# Altium PCB RUMBA_V2-bla.PcbDoc (part 1 of 2)
Units mm, origin at the board's own origin, x right, y up, seen from the top; angles counter-clockwise.
Board outline 145 x 75 mm, 2 copper layers (Top Layer, Bottom Layer); 189 components, 179 nets, 824 pads, 160 vias.
Unrouted connection lines stored in the file: 201.
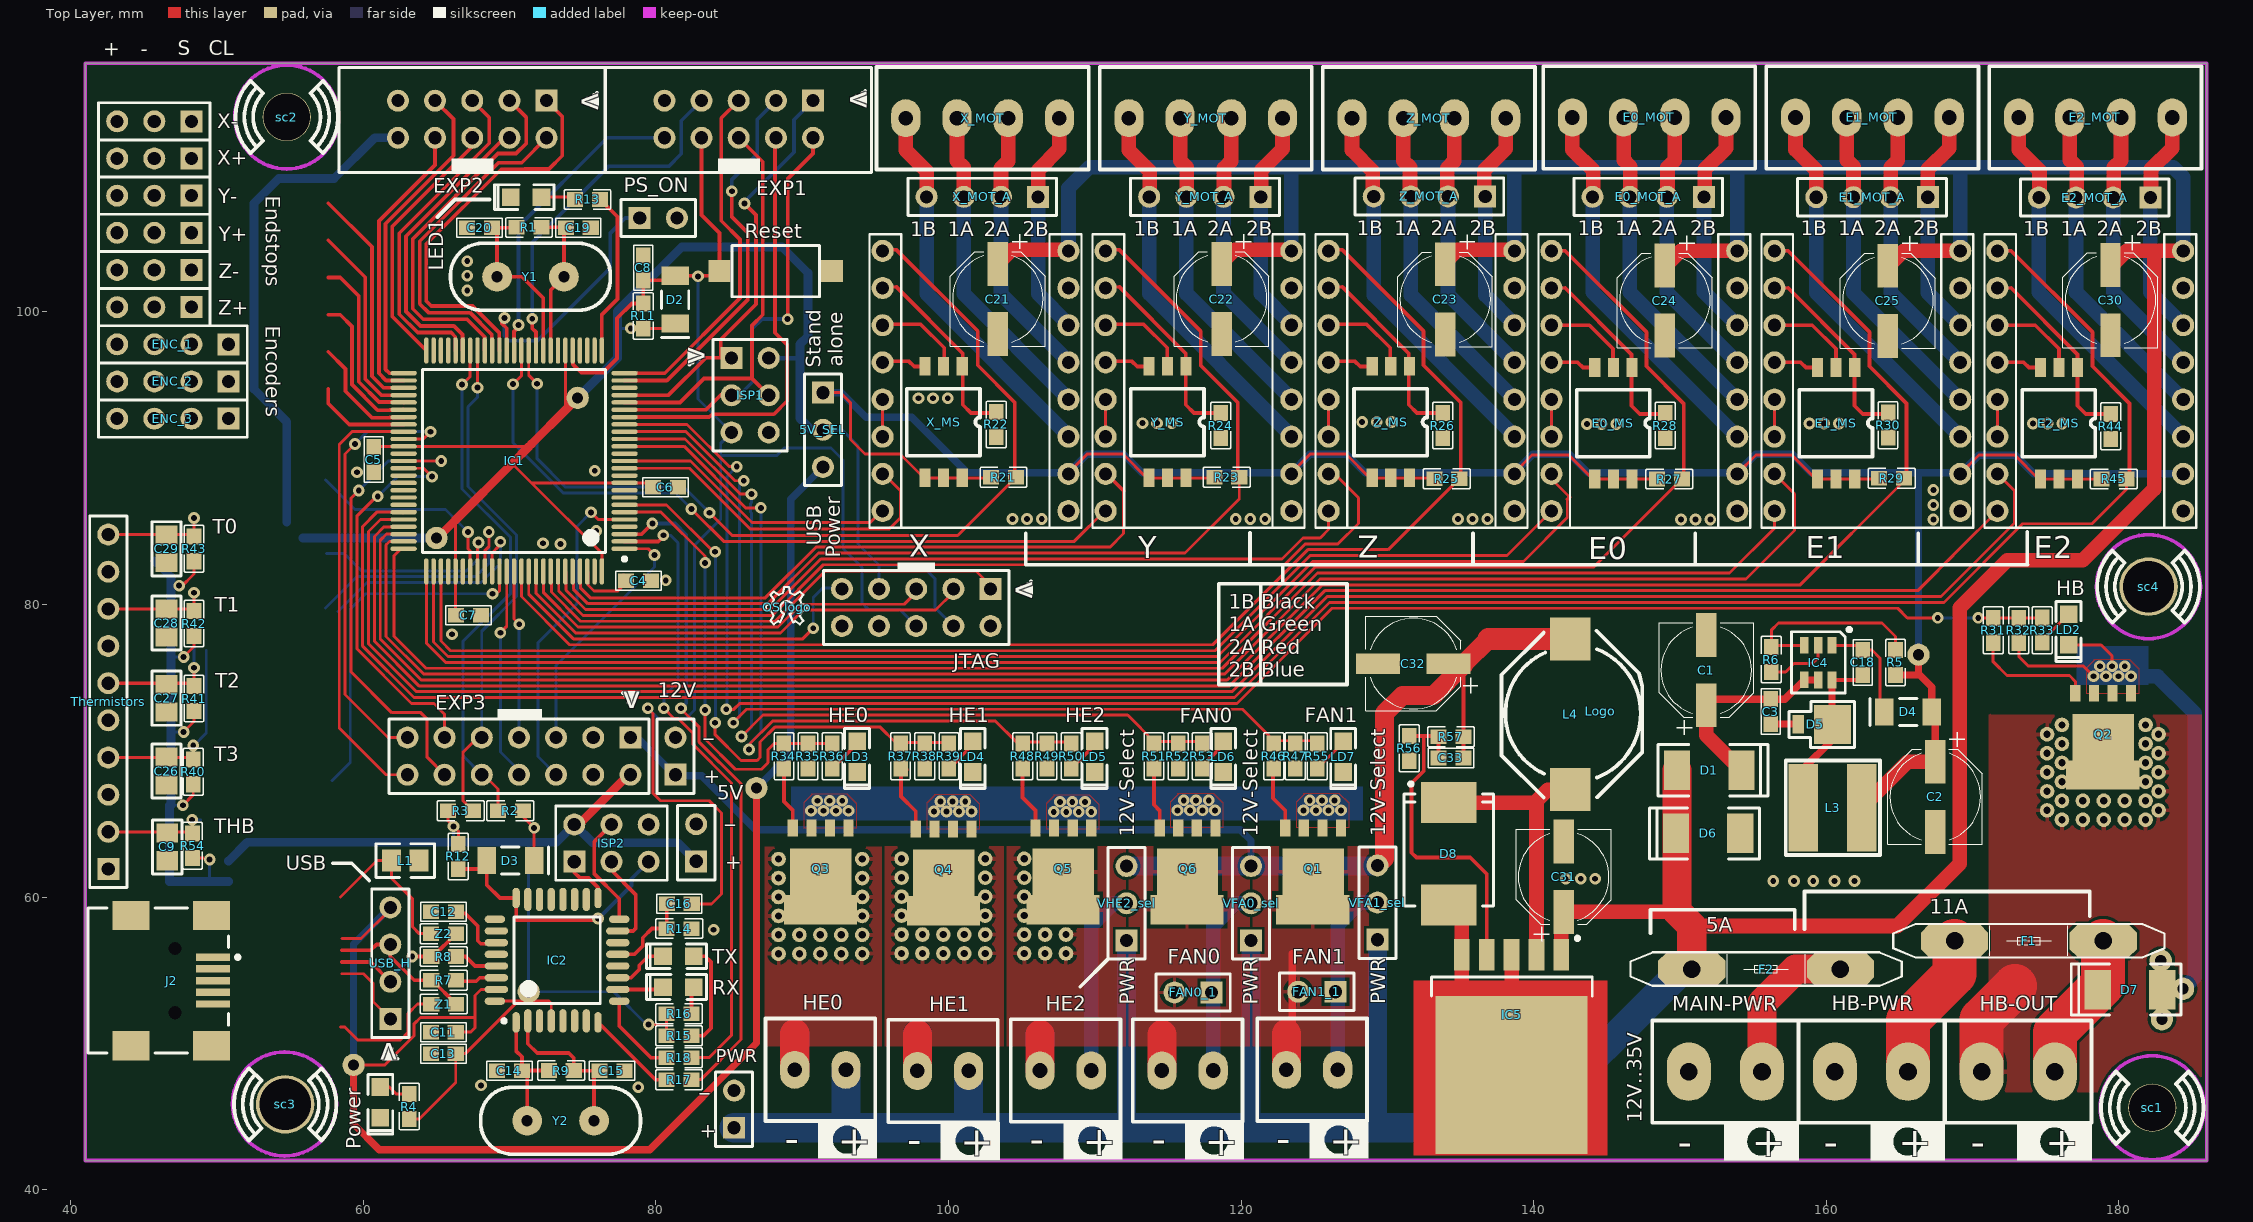
[diagram p0: Top Layer view]
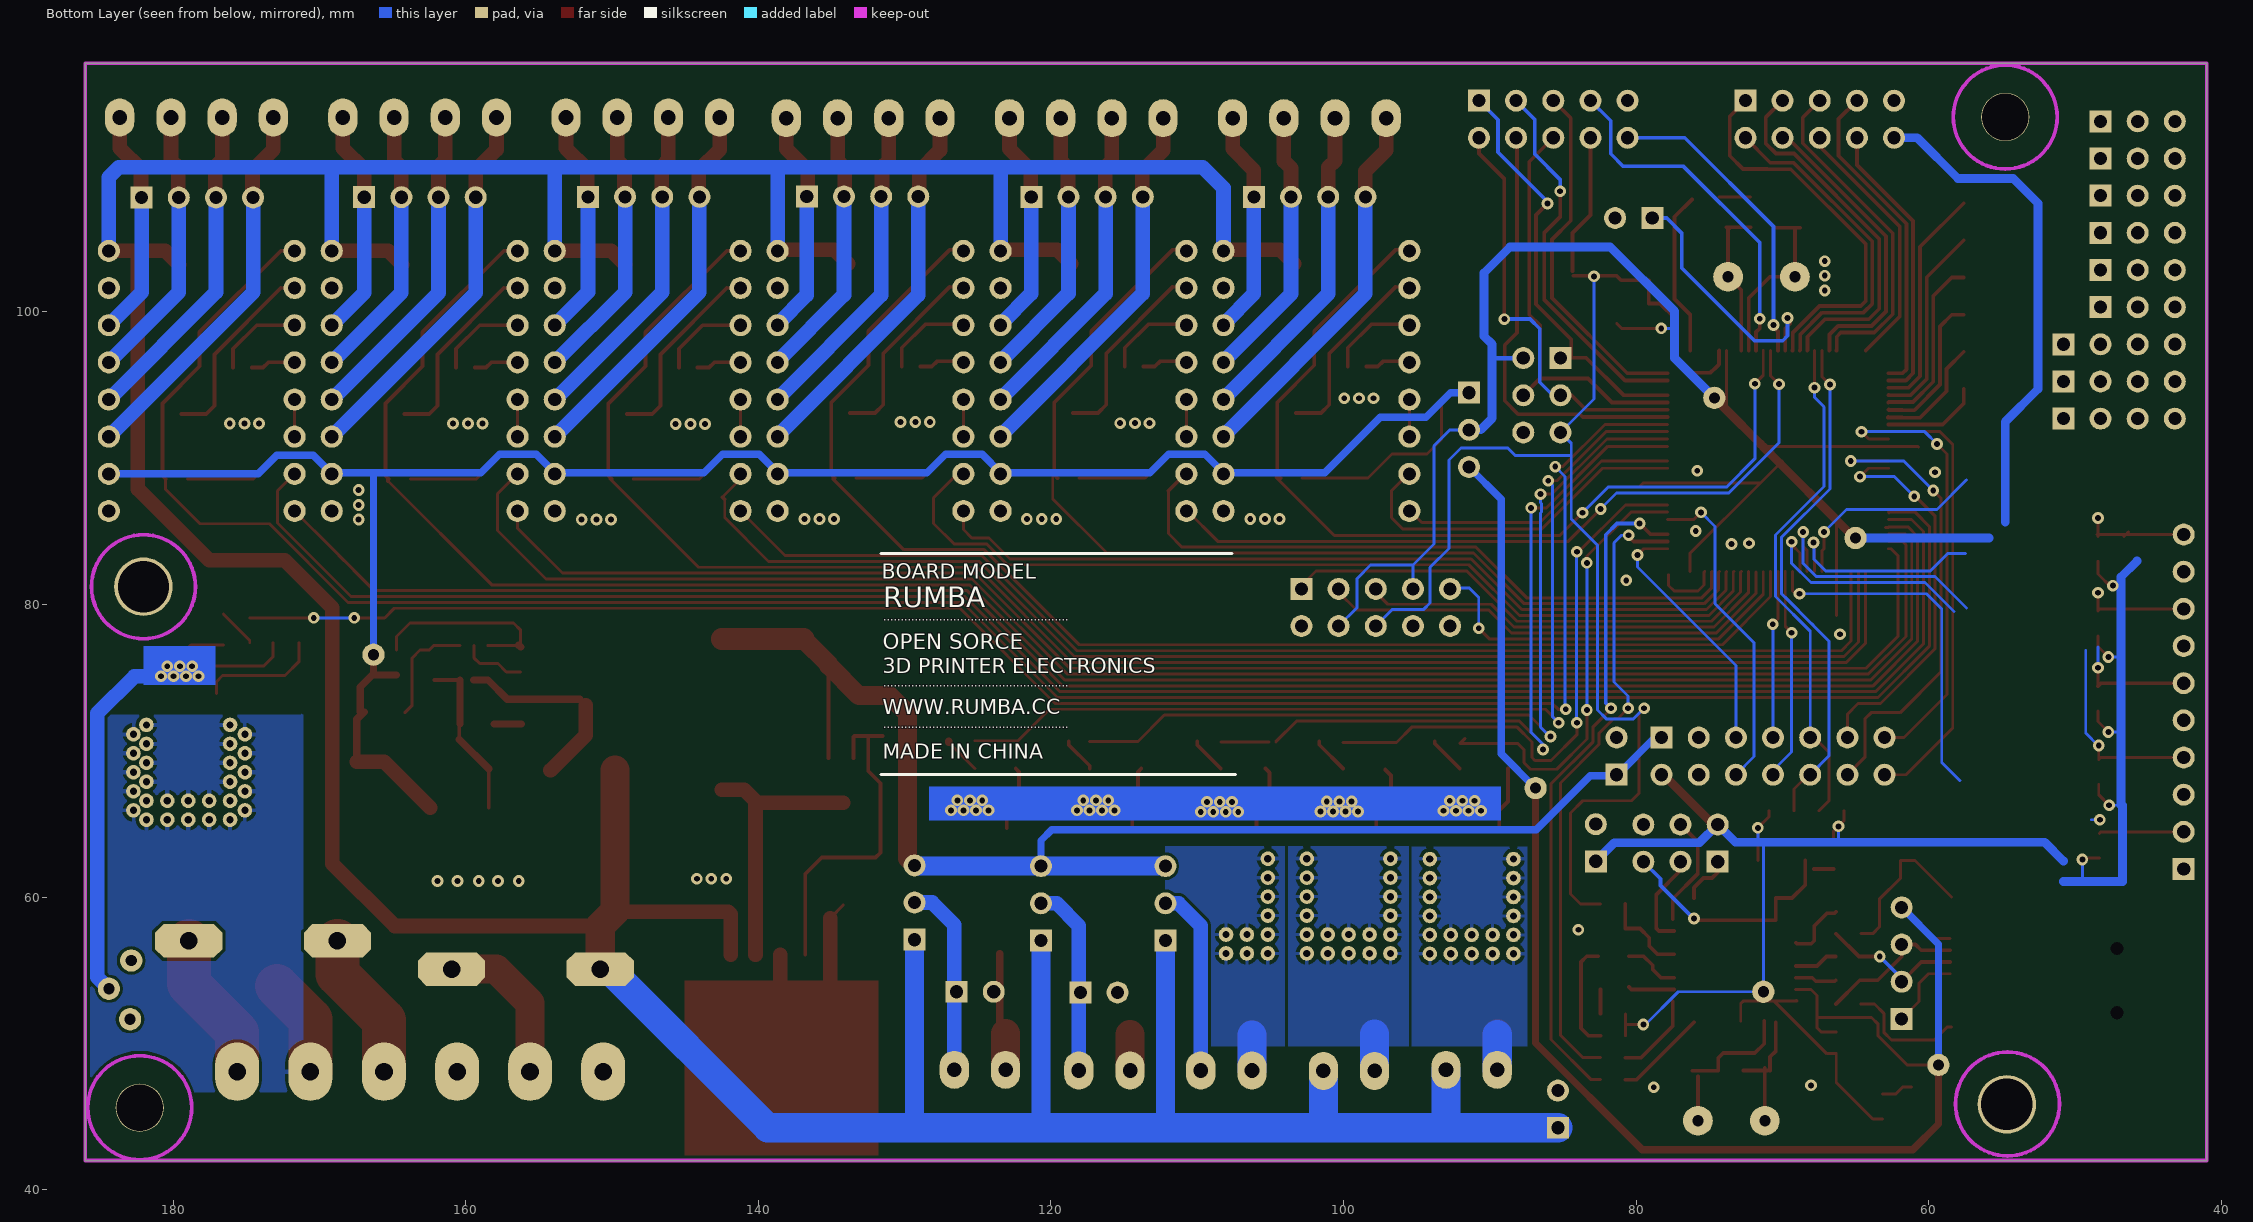
[diagram p1: Bottom Layer view, seen from below]
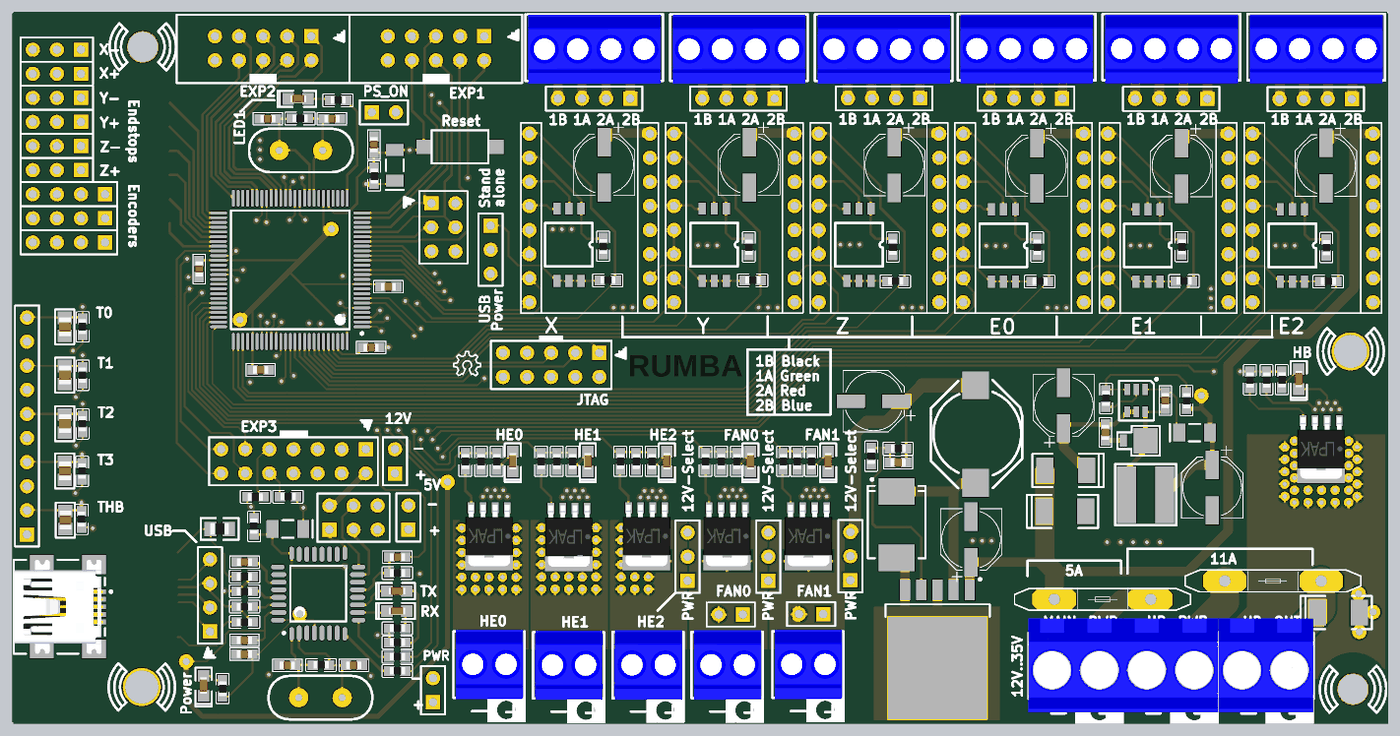
[diagram p3: 3D render of the assembled board from above, using the file's embedded part models]

## Layer stack, top to bottom
Top Solder: solder mask 0.0102, Solder Resist, Dk 3.5
Top Layer: signal copper 0.0356
Dielectric1: dielectric 0.32, FR-4, Dk 4.8
Bottom Layer: signal copper 0.0356
Bottom Solder: solder mask 0.0102, Solder Resist, Dk 3.5

## Board outline
41,42 41,117 186,117 186,42

## Design rules (kind name [scope] priority, off if disabled: settings)
Clearance [All] p1: gap=0.2
HoleSize [All] p1: absolutevalues=TRUE maxlimit=4 minlimit=0.025 maxpercent=80.000 minpercent=20.000
MinimumSolderMaskSliver [All] p1: minsoldermaskwidth=0
PolygonConnect PolygonConnect_1 [All] p1: connectstyle=Relief reliefconductorwidth=0.254 reliefentries=4 polygonreliefangle="90 Angle" airgapwidth=0.254
RoutingVias [All] p1: holewidth=0.4 width=0.8 viastyle="Through Hole" minholewidth=0.2 minwidth=0.6 maxholewidth=1 maxwidth=1.27
SilkToSilkClearance [All] p1: silktosilkclearance=0.1
SilkToSolderMaskClearance SilkscreenOverComponentPads [IsPad] p1: minsilkscreentomaskgap=0 clearancetoexposedcopper=TRUE
SolderMaskExpansion [All] p1: expansion=0.102
Width Width_1 [All] p1: maxlimit=3 minlimit=0.1 preferedwidth=0.2 minimp=50.000000 maximp=50.000000 favimp=50.000000
26 further rules are at their usual default settings.

## Components (designator, comment, footprint, x,y, rotation, side; value= is the part's Value field where it differs from the comment)
5V "Header 2" HDR1X2 82.758,62.455 r90 top
5V_SEL "Header 3" HDR1X3 91.419,94.484 r270 top
12V "Header 2" HDR1X2 81.335,68.373 r90 top
C1 "Cap Pol3" "CAP EL PANASONIC" 151.795,77.974 r180 top
C2 "Cap Pol3" "CAP EL PANASONIC" 167.441,64.41 r0 top
C3 "Cap Semi" "CAP 1608-0603" 156.189,72.691 r90 top
C4 "Cap Semi" "CAP 1608-0603" 78.821,81.632 r180 top
C5 "Cap Semi" "CAP 1608-0603" 60.71,89.912 r90 top
C6 "Cap Semi" "CAP 1608-0603" 80.649,88.032 r180 top
C7 "Cap Semi" "CAP 1608-0603" 67.187,79.269 r180 top
C8 "Cap Semi" "CAP 1608-0603" 79.125,103.018 r270 top
C9 "Cap Semi" Cap2012-0805 46.605,63.442 r90 top
C11 "Cap Semi" "CAP 1608-0603" 65.475,50.778 r0 top
C12 "Cap Semi" "CAP 1608-0603" 65.488,59.008 r0 top
C13 "Cap Semi" "CAP 1608-0603" 65.475,49.305 r0 top
C14 "Cap Semi" "CAP 1608-0603" 69.996,48.143 r0 top
C15 "Cap Semi" "CAP 1608-0603" 76.996,48.143 r180 top
C16 "Cap Semi" "CAP 1608-0603" 81.6,59.546 r180 top
C18 "Cap Semi" "CAP 1608-0603" 162.488,76.044 r90 top
C19 "Cap Semi" "CAP 1608-0603" 74.699,105.752 r180 top
C20 "Cap Semi" "CAP 1608-0603" 67.949,105.752 r0 top
C21 "Cap Pol3" "CAP EL PANASONIC" 103.374,98.434 r0 top
C22 "Cap Pol3" "CAP EL PANASONIC" 118.665,98.436 r0 top
C23 "Cap Pol3" "CAP EL PANASONIC" 133.956,98.41 r0 top
C24 "Cap Pol3" "CAP EL PANASONIC" 148.968,98.334 r0 top
C25 "Cap Pol3" "CAP EL PANASONIC" 164.208,98.309 r0 top
C26 "Cap Semi" Cap2012-0805 46.554,68.624 r90 top
C27 "Cap Semi" Cap2012-0805 46.554,73.602 r90 top
C28 "Cap Semi" Cap2012-0805 46.554,78.733 r90 top
C29 "Cap Semi" Cap2012-0805 46.554,83.813 r90 top
C30 "Cap Pol3" "CAP EL PANASONIC" 179.422,98.36 r0 top
C31 "Cap Pol3" "CAP EL PANASONIC" 142.041,63.852 r180 top
C32 "Cap Pol3" "CAP EL PANASONIC" 129.316,75.967 r270 top
C33 "Cap Semi" "Cap 1608-0603" 134.346,69.516 r180 top
D1 "M4" "1N4007 SMD" 148.391,70.557 r270 top
D2 "CD1206-S01575" "1N4148 SMD" 81.324,100.842 r90 top
D3 "CD1206-S01575" "1N4148 SMD" 70.058,62.505 r180 top
D4 "Diode" "1N4148 SMD" 165.587,72.665 r0 top
D5 "Diode schottky" MBRM140 160.431,71.802 r180 top
D6 "M4" "1N4007 SMD" 155.529,62.48 r90 top
D7 "M4" "1N4007 SMD" 184.358,51.812 r90 top
D8 "MURS320" MURS320 134.193,62.963 r90 top
E0 "A4988BREAKOUT" A4988BREAKOUT 141.211,104.176 r270 top locked
E0_MOT "Header 4" "TERM4 3.5MM" 142.643,113.295 r0 top
E0_MOT_A "Header 4" HDR1X4 151.642,107.87 r180 top
E0_MS "SW DIP-3" "DIPSW SO6" 146.716,96.204 r270 top
E1 "A4988BREAKOUT" A4988BREAKOUT 156.451,104.176 r270 top locked
E1_MOT "Header 4" "TERM4 3.5MM" 157.893,113.295 r0 top
E1_MOT_A "Header 4" HDR1X4 166.933,107.844 r180 top
E1_MS "SW DIP-3" "DIPSW SO6" 161.942,96.204 r270 top
E2 "A4988BREAKOUT" A4988BREAKOUT 171.691,104.176 r270 top locked
E2_MOT "Header 4" "TERM4 3.5MM" 173.143,113.295 r0 top
E2_MOT_A "Header 4" HDR1X4 182.148,107.819 r180 top
E2_MS "SW DIP-3" "DIPSW SO6" 177.168,96.204 r270 top
ENC_1 "Header 4" HDR1X4 50.8,97.79 r180 top
ENC_2 "Header 4" HDR1X4 50.8,95.25 r180 top
ENC_3 "Header 4" HDR1X4 50.8,92.71 r180 top
EXP1 "Header 5X2" "HDR2X5_EXP INER ONLY\" 94.746,116.746 r180 top
EXP2 "Header 5X2" "HDR2X5_EXP INER ONLY\" 76.535,116.746 r180 top
EXP3 "Header 7X2" HDR2X7 78.262,70.913 r180 top
F1 "MFR1100" MFR500 173.842,57.019 r0 top
F2 "MFR500" MFR500 155.884,55.089 r180 top
FAN0 "PORT 2 pina_0.2" "TERM2 3.5mm" 118.089,48.154 r180 top
FAN0_1 "PORT 2 pina_0.2" HDR1X2 117.987,53.488 r180 top
FAN1 "PORT 2 pina_0.2" "TERM2 3.5mm" 126.598,48.205 r180 top
FAN1_1 "PORT 2 pina_0.2" HDR1X2 126.446,53.539 r180 top
HB-OUT "PORT 2 pina_0.2" "TERM2 5MM" 170.616,48.078 r0 top
HB-PWR "PORT 2 pina_0.2" "TERM2 5MM" 160.583,48.078 r0 top
HE0 "PORT 2 pina_0.2" "TERM2 3.5MM" 92.994,48.205 r180 top
HE1 "PORT 2 pina_0.2" "TERM2 3.5MM" 101.376,48.129 r180 top
HE2 "PORT 2 pina_0.2" "TERM2 3.5mm" 109.758,48.154 r180 top
IC1 "ATMEGA2560" TQFP100N 70.31,89.817 r180 top locked
IC2 "ATMEGA16U2-AU" TQFP32N 73.248,55.697 r90 top
IC4 "LT1933ES6" SOT23-6N 159.44,76.044 r270 top
IC5 "LM2596" TO-263 138.486,50.491 r270 top
ISP1 "Header 3X2" HDR2X3 85.171,96.846 r270 top
ISP2 "Header 3X2" HDR2X3 74.426,62.429 r0 top
J2 "USB conector" USB_MINI/SM0.8-6H5 41.878,54.301 r180 top
JTAG "Header 5X2" HDR2X5 102.874,81.073 r180 top
L1 "Zavojnica" "RES 2012-0805" 62.869,62.505 r0 top
L3 "Zavojnica" INDUCTOR_MSS6122D 158.424,66.112 r270 top
L4 "Inductor" DO3316P 142.498,67.357 r90 top
LD2 "GREEN" "LED 0805" 176.56,79.346 r270 top
LD3 "GREEN" "LED 0805" 93.756,70.659 r270 top
LD4 "GREEN" "LED 0805" 101.658,70.659 r270 top
LD5 "GREEN" "LED 0805" 109.99,70.659 r270 top
LD6 "GREEN" "LED 0805" 118.778,70.659 r270 top
LD7 "GREEN" "LED 0805" 126.979,70.659 r270 top
LED1 "YELLOW" "LED 0805" 72.183,107.844 r180 top
Logo "Logo" "TAURINO LOGO HIGH" 144.556,72.716 r270 top
MAIN-PWR "PORT 2 pina_0.2" "TERM2 5MM" 150.601,48.078 r0 top (schematic designator Main-PWR)
"OS logo" "Logo" "OS LOGO TOP" 88.981,79.828 r0 top
Power "GREEN" "LED 0805" 61.168,47.029 r270 top
PS_ON "Header 2" HDR1X2 78.897,106.422 r0 top
PWR "Header 2" HDR1X2 85.348,44.243 r90 top
Q1 "PSMN7R0-60YS" LFPACK 126.827,64.727 r180 top
Q2 "PSMN7R0-60YS" LFPACK 180.827,73.935 r180 top
Q3 "PSMN7R0-60YS" LFPACK 93.174,64.727 r180 top
Q4 "PSMN7R0-60YS" LFPACK 101.579,64.664 r180 top
Q5 "PSMN7R0-60YS" LFPACK 109.759,64.727 r180 top
Q6 "PSMN7R0-60YS" LFPACK 118.242,64.727 r180 top
R1 "Res3" "RES 1608-0603" 71.328,105.782 r0 top
R2 "Res3" "RES 1608-0603" 70.058,65.909 r0 top
R3 "Res3" "RES 1608-0603" 66.654,65.909 r180 top
R4 "Res3" "RES 1608-0603" 63.149,45.691 r270 top
R5 "Res3" "RES 1608-0603" 164.723,76.044 r270 top
R6 "Res3" "RES 1608-0603" 156.24,76.247 r90 top
R7 "Res3" "RES 1608-0603" 65.498,54.324 r180 top
R8 "Res3" "RES 1608-0603" 65.498,55.947 r180 top
R9 "Res3" "RES 1608-0603" 73.537,48.154 r0 top
R11 "Res3" "RES 1608-0603" 79.132,99.729 r270 top
R12 "Res3" "RES 1608-0603" 66.502,62.785 r90 top
R13 "Res3" "RES 1608-0603" 75.333,107.692 r0 top
R14 "Res3" "RES 1608-0603" 81.589,57.857 r0 top
R15 "Res3" "RES 1608-0603" 81.584,50.531 r0 top
R16 "Res3" "RES 1608-0603" 81.584,52.031 r0 top
R17 "Res3" "RES 1608-0603" 81.584,47.531 r0 top
R18 "Res3" "RES 1608-0603" 81.584,49.031 r0 top
R21 "Res3" "RES 1608-0603" 103.756,88.708 r0 top
R22 "Res3" "RES 1608-0603" 103.273,92.314 r270 top
R23 "Res3" "RES 1608-0603" 119.021,88.708 r0 top
R24 "Res3" "RES 1608-0603" 118.615,92.238 r270 top
R25 "Res3" "RES 1608-0603" 134.058,88.606 r0 top
R26 "Res3" "RES 1608-0603" 133.778,92.238 r270 top
R27 "Res3" "RES 1608-0603" 149.272,88.581 r0 top
R28 "Res3" "RES 1608-0603" 148.993,92.238 r270 top
R29 "Res3" "RES 1608-0603" 164.462,88.631 r0 top
R30 "Res3" "RES 1608-0603" 164.221,92.262 r270 top
R31 "Res3" "RES 1608-0603" 171.404,78.242 r270 top
R32 "Res3" "RES 1608-0603" 173.156,78.242 r270 top
R33 "Res3" "RES 1608-0603" 174.756,78.253 r270 top
R34 "Res3" "RES 1608-0603" 88.751,69.643 r270 top
R35 "Res3" "RES 1608-0603" 90.402,69.643 r270 top
R36 "Res3" "RES 1608-0603" 92.053,69.643 r270 top
R37 "Res3" "RES 1608-0603" 96.727,69.643 r270 top
R38 "Res3" "RES 1608-0603" 98.378,69.643 r270 top
R39 "Res3" "RES 1608-0603" 100.029,69.643 r270 top
R40 "Res3" "RES 1608-0603" 48.383,68.573 r90 top
R41 "Res3" "RES 1608-0603" 48.434,73.577 r90 top
R42 "Res3" "RES 1608-0603" 48.434,78.708 r90 top
R43 "Res3" "RES 1608-0603" 48.434,83.813 r90 top
R44 "Res3" "RES 1608-0603" 179.447,92.182 r270 top
R45 "Res3" "RES 1608-0603" 179.652,88.585 r0 top
R46 "Res3" "RES 1608-0603" 122.229,69.643 r270 top
R47 "Res3" "RES 1608-0603" 123.702,69.643 r270 top
R48 "Res3" "RES 1608-0603" 105.084,69.643 r270 top
R49 "Res3" "RES 1608-0603" 106.735,69.643 r270 top
R50 "Res3" "RES 1608-0603" 108.386,69.643 r270 top
R51 "Res3" "RES 1608-0603" 114.05,69.643 r270 top
R52 "Res3" "RES 1608-0603" 115.701,69.643 r270 top
R53 "Res3" "RES 1608-0603" 117.352,69.643 r270 top
R54 "Res3" "RES 1608-0603" 48.332,63.518 r90 top
R55 "Res3" "RES 1608-0603" 125.201,69.643 r270 top
R56 "Res3" "RES 1608-0603" 131.5,70.176 r270 top
R57 "Res3" "RES 1608-0603" 134.346,70.964 r0 top
Reset "" "SW-PB SMD 2PIN" 88.193,102.79 r180 top
RX "YELLOW" "LED 0805" 82.589,53.857 r180 top
sc1 "Sraf" "SRAF 3MM - RUPA 3.2" 182.275,45.614 r45 top
sc2 "Sraf" "SRAF 3MM - RUPA 3.2" 54.773,113.325 r45 top
sc3 "Sraf" "Sraf 3mm - rupa 3.5" 54.665,45.843 r45 top
sc4 "Sraf" "SRAF 3MM - RUPA 3.5" 182.021,81.225 r45 top
Thermistors "Header 10" HDR1X10 42.575,61.93 r90 top
TX "YELLOW" "LED 0805" 82.589,55.966 r180 top
USB_H "Header 4" HDR1X4 61.853,51.685 r90 top
VFA0_sel "Header 3" HDR1X3 120.68,57.044 r90 top
VFA1_sel "Header 3" HDR1X3 129.316,57.095 r90 top
VHE2_sel "Header 3" HDR1X3 112.171,57.044 r90 top
X "A4988BREAKOUT" A4988BREAKOUT 95.499,104.176 r270 top locked
X+ "Header 3" HDR1X3 48.26,110.49 r180 top (schematic designator Xmax)
X- "Header 3" HDR1X3 48.26,113.03 r180 top (schematic designator Xmin)
X_MOT "Header 4" "TERM4 3.5MM" 97.081,113.244 r0 top locked
X_MOT_A "Header 4" HDR1X4 106.126,107.87 r180 top
X_MS "SW DIP-3" "DIPSW SO6" 100.941,96.278 r270 top
Y "A4988BREAKOUT" A4988BREAKOUT 110.739,104.176 r270 top locked
Y1 "16MHz" X-TAL 73.716,102.404 r180 top
Y2 "16MHz" X-TAL 75.773,44.725 r180 top
Y+ "Header 3" HDR1X3 48.26,105.41 r180 top (schematic designator Ymax)
Y- "Header 3" HDR1X3 48.26,107.95 r180 top (schematic designator Ymin)
Y_MOT "Header 4" "TERM4 3.5MM" 112.331,113.244 r0 top
Y_MOT_A "Header 4" HDR1X4 121.34,107.87 r180 top
Y_MS "SW DIP-3" "DIPSW SO6" 116.246,96.278 r270 top
Z "A4988BREAKOUT" A4988BREAKOUT 125.979,104.176 r270 top locked
Z1 "VARISTOR" "RES 1608-0603" 65.498,52.697 r180 top
Z2 "VARISTOR" "RES 1608-0603" 65.488,57.508 r180 top
Z+ "Header 3" HDR1X3 48.26,100.33 r180 top (schematic designator Zmax)
Z- "Header 3" HDR1X3 48.26,102.87 r180 top (schematic designator Zmin)
Z_MOT "Header 4" "TERM4 3.5MM" 127.581,113.244 r0 top
Z_MOT_A "Header 4" HDR1X4 136.682,107.895 r180 top
Z_MS "SW DIP-3" "DIPSW SO6" 131.5,96.278 r270 top

## Footprints (in the part's own frame and the unit in brackets; to place one, negate y for a bottom-side part, rotate by r counter-clockwise, add the part's x,y. Pads: shape width x height; smd on the part's side, far side on the other; paste and mask are expansions set on the pad)
"1N4007 SMD" [mm]
  rect 2.7x1.8 smd: 1(1.88,1.407) 2(1.88,5.807)
  silkscreen extent 0.13,0.11 3.63,7.62
"1N4148 SMD" [mm] "MELF Diode, 2-Leads, Body 3.5x1.7mm, IPC Medium Density"
  rect 1.25x1.85 smd: 1(1.625,0) 2(-1.625,0)
  silkscreen extent -2.6,-0.93 0.6,0.93, body extent -1.85,-0.85 1.85,0.85, height 1.7
A4988BREAKOUT [mm]
  round 1.51 hole 0.9: 1(0,0) 2(2.54,0) 3(5.08,0) 4(7.62,0) 5(10.16,0) 6(12.7,0) 7(15.24,0) 8(17.78,0) 9(17.78,12.7) 10(15.24,12.7) 11(12.7,12.7) 12(10.16,12.7) 13(7.62,12.7) 14(5.08,12.7) 15(2.54,12.7) 16(0,12.7)
  silkscreen extent -1.14,-0.89 18.92,13.59
Cap2012-0805 [mm]
  rect 1.3x1.5 smd: 1(-0.95,0) 2(0.95,0)
  silkscreen extent -1.85,-1 1.85,1, body extent -1,-0.65 1,0.6, height 1.5
"CAP 1608-0603" [mm]
  rect 1.1x1 smd: 1(-0.85,0) 2(0.85,0)
  silkscreen extent -1.55,-0.65 1.55,0.65, body extent -0.8,-0.4 0.8,0.4, height 0.4
"Cap 1608-0603" [mm]
  rect 1.1x1 smd: 1(-0.85,0) 2(0.85,0)
  silkscreen extent -1.55,-0.65 1.55,0.65, body extent -0.8,-0.4 0.8,0.4, height 0.4
"CAP EL PANASONIC" [mil]
  rect 55x118 smd: 1(0,190.97) 2(0,1.97)
  silkscreen extent -128,-31 127,271
"DIPSW SO6" [mil]
  rect 50x30 smd: 1(0,0) 2(0,-50) 3(0,-100) 4(300,-100) 5(300,-50) 6(300,0)
  silkscreen extent 60,-149 240,48
DO3316P [mm] "SMT Power Inductors"
  rect 2.92x2.79 smd: 1(0,0) 2(10.29,0)
  silkscreen extent -0.55,-4.93 10.86,4.7
HDR1X2 [mm] "Connector; Header; 2 Position"
  rect 1.5x1.5 hole 0.9: 1(0,0)
  round 1.5 hole 0.9: 2(2.54,0)
  silkscreen extent -1.27,-1.27 3.81,1.27
HDR1X3 [mm] "Connector; Header; 3 Position"
  rect 1.5x1.5 hole 0.9: 1(0,0)
  round 1.5 hole 0.9: 2(2.54,0) 3(5.08,0)
  silkscreen extent -1.27,-1.27 6.35,1.27
HDR1X4 [mm] "Connector; Header; 4 Position"
  rect 1.5x1.5 hole 0.9: 1(0,0)
  round 1.5 hole 0.9: 2(2.54,0) 3(5.08,0) 4(7.62,0)
  silkscreen extent -1.27,-1.27 8.89,1.27
HDR1X10 [mm] "Connector; Header; 10 Position"
  rect 1.5x1.5 hole 0.9: 1(0,0)
  round 1.5 hole 0.9: 2(2.54,0) 3(5.08,0) 4(7.62,0) 5(10.16,0) 6(12.7,0) 7(15.24,0) 8(17.78,0) 9(20.32,0) 10(22.86,0)
  silkscreen extent -1.27,-1.27 24.13,1.27
HDR2X3 [mm] "Connector; Header; 3x2 Position"
  rect 1.5x1.5 hole 0.9: 1(0,0)
  round 1.5 hole 0.9: 2(0,2.54) 3(2.54,0) 4(2.54,2.54) 5(5.08,0) 6(5.08,2.54)
  silkscreen extent -1.27,-1.27 6.35,3.81
HDR2X5 [mm] "Connector; Header; 5x2 Position"
  rect 1.5x1.5 hole 0.9: 1(0,0)
  round 1.5 hole 0.9: 2(0,2.54) 3(2.54,0) 4(2.54,2.54) 5(5.08,0) 6(5.08,2.54) 7(7.62,0) 8(7.62,2.54) 9(10.16,0) 10(10.16,2.54)
  silkscreen extent -1.27,-1.27 11.43,3.81
"HDR2X5_EXP INER ONLY\" [mm] "Connector; Header; 5x2 Position"
  rect 1.5x1.5 hole 0.9: 1(4.004,2.302)
  round 1.5 hole 0.9: 2(4.004,4.842) 3(6.544,2.302) 4(6.544,4.842) 5(9.084,2.302) 6(9.084,4.842) 7(11.624,2.302) 8(11.624,4.842) 9(14.164,2.302) 10(14.164,4.842)
  silkscreen extent 0,0.03 18.2,7.23
HDR2X7 [mm] "Connector; Header; 7x2 Position"
  rect 1.5x1.5 hole 0.9: 1(0,0)
  round 1.5 hole 0.9: 2(0,2.54) 3(2.54,0) 4(2.54,2.54) 5(5.08,0) 6(5.08,2.54) 7(7.62,0) 8(7.62,2.54) 9(10.16,0) 10(10.16,2.54) 11(12.7,0) 12(12.7,2.54) 13(15.24,0) 14(15.24,2.54)
  silkscreen extent -1.27,-1.27 16.51,3.81
INDUCTOR_MSS6122D [mm]
  rect 6x2 smd: 1(0,0) 2(0,4)
  silkscreen extent -3.22,-1.2 3.22,5.25
"LED 0805" [mm]
  rect 1.2x1.2 smd: 1(0,0) 2(2.1,0)
  silkscreen extent -0.86,-0.85 3.22,0.85, body extent 0.18,-0.4 1.88,0.4, height 0.65
LFPACK [mm]
  rect 0.7x1.15 smd: 1(3.81,0) 3(0,0) 3(1.27,0) 3(2.54,0)
  rect 4.2x3.2 smd: 2(1.905,3)
  rect 5x2 smd: 2(1.93,5.588)
  body extent -0.58,-0.33 4.42,6.14, height 1.1
MBRM140 [mm]
  rect 0.762x1.27 smd: 1(2.351,-0.025)
  rect 2.54x2.67 smd: 2(0,0)
  silkscreen extent -1.5,-1.58 2.98,1.58
MFR500 [mm]
  oct 4.6x2.3 hole 1.2: 1(-5.08,0) 2(5.08,0)
  silkscreen extent -9.27,-1.14 9.27,1.14
MURS320 [mm] "Molded Diode, 2-Leads, Body 6.8x5.8mm, IPC Medium Density"
  rect 2.8x3.8 smd: 1(-3.5,0) 2(3.5,0)
  silkscreen extent -3.55,-3.05 4.9,3.05, body extent -3.55,-3.05 3.55,3.05, height 2.13
"OS LOGO TOP" [mm]
  silkscreen extent -1.45,-1.17 1.37,1.37
"RES 1608-0603" [mm]
  rect 1.1x1 smd: 1(-0.85,0) 2(0.85,0)
  silkscreen extent -1.6,-0.68 1.6,0.67, body extent -0.77,-0.38 0.82,0.43, height 0.4
"RES 2012-0805" [mm]
  rect 1.3x1.5 smd: 1(-0.95,0) 2(0.95,0)
  silkscreen extent -2,-1.15 2,1.15, body extent -1,-0.63 1,0.63, height 1.5
SOT23-6N [mm] "SOT23, 6-Leads, Body 3.0x3.0mm (max), Pitch 0.95mm, IPC Medium Density"
  rect 1.15x0.6 smd: 1(-1.175,0.95) 2(-1.175,0) 3(-1.175,-0.95) 4(1.175,-0.95) 5(1.2,0) 6(1.2,0.95)
  silkscreen extent -2.37,-1.82 2.1,2.25, body extent -0.85,-1.5 0.85,1.5, height 1.45
"SRAF 3MM - RUPA 3.2" [mm]
  round 3.3 hole 3.2: 0(0,0)
  silkscreen extent -3.5,-3.5 3.5,3.5
"Sraf 3mm - rupa 3.5" [mm]
  round 4 hole 3.5: 0(0,0)
  silkscreen extent -3.5,-3.5 3.5,3.5
"SRAF 3MM - RUPA 3.5" [mm]
  round 4 hole 3.5: 0(0,0)
  silkscreen extent -3.5,-3.5 3.5,3.5
"SW-PB SMD 2PIN" [mm]
  rect 1.5x1.5 smd: 1(-3.85,0) 2(3.85,0)
  silkscreen extent -3,-1.75 3,1.75
"TAURINO LOGO HIGH" [mm]
"TERM2 3.5mm" [mm]
  oval 2x2.6 hole 1: 1(0,0) 2(3.5,0)
  silkscreen extent -2,-3.5 5.5,3.5, body extent -1.85,-3.67 5.26,3.62, height 8.51
"TERM2 3.5MM" [mm]
  oval 2x2.6 hole 1: 1(0,0) 2(3.5,0)
  silkscreen extent -2,-3.5 5.5,3.5, body extent -1.85,-3.67 5.26,3.62, height 8.51
"TERM2 5MM" [mm]
  oval 3x4 hole 1.2: 1(0,0) 2(5,0)
  silkscreen extent -2.5,-3.5 7.5,3.5, body extent -2.54,-4.9 7.47,5, height 14.6
"TERM4 3.5MM" [mm]
  oval 2x2.6 hole 1: 1(0,0) 2(3.5,0) 3(7,0) 4(10.5,0)
  silkscreen extent -2,-3.5 12.5,3.5, body extent -1.73,-3.81 12.24,3.48, height 8.51
TO-263 [mm] "D2-PAK, 6-Pads, Body 10.4x8.9mm (max), IPC Medium Density"
  rect 2.16x1.07 smd: 1(-5.582,3.4) 2(-5.582,1.7) 3(-5.582,0) 4(-5.582,-1.7) 5(-5.582,-3.4)
  rect 10.8x10.41 smd: 6(2.65,0)
  silkscreen extent -6.82,-5.47 -2.75,5.52, body extent -2.87,-5.33 8.18,5.31, height 4.65
TQFP32N [mm] "TQFP, 32-Leads, Body 9.0x9.0mm (max), Pitch 0.80mm, IPC Medium Density"
  oval 1.4x0.5 smd: 1(-4.25,2.8) 8(-4.25,-2.8) 17(4.25,-2.8) 24(4.25,2.8)
  oval 1.6x0.5 smd: 2(-4.15,2) 3(-4.15,1.2) 4(-4.15,0.4) 5(-4.15,-0.4) 6(-4.15,-1.2) 7(-4.15,-2) 18(4.15,-2) 19(4.15,-1.2) 20(4.15,-0.4) 21(4.15,0.4) 22(4.15,1.2) 23(4.15,2)
  oval 0.5x1.4 smd: 9(-2.8,-4.25) 16(2.8,-4.25) 25(2.8,4.25) 32(-2.8,4.25)
  oval 0.5x1.6 smd: 10(-2,-4.15) 11(-1.2,-4.15) 12(-0.4,-4.15) 13(0.4,-4.15) 14(1.2,-4.15) 15(2,-4.15) 26(2,4.15) 27(1.2,4.15) 28(0.4,4.15) 29(-0.4,4.15) 30(-1.2,4.15) 31(-2,4.15)
  silkscreen extent -4.27,-2.95 2.95,3.75, body extent -3.5,-3.5 3.5,3.5, height 1.2
TQFP100N [mm] "TQFP, 100-Leads, Body 16.3x16.3mm (max), Pitch 0.50mm, IPC Medium Density"
  oval 1.8x0.3 smd: 1(-7.55,6) 2(-7.55,5.5) 3(-7.55,5) 4(-7.55,4.5) 5(-7.55,4) 6(-7.55,3.5) 7(-7.55,3) 8(-7.55,2.5) 9(-7.55,2) 10(-7.55,1.5) 11(-7.55,1) 12(-7.55,0.5) 13(-7.55,0) 14(-7.55,-0.5) 15(-7.55,-1) 16(-7.55,-1.5) 17(-7.55,-2) 18(-7.55,-2.5) 19(-7.55,-3) 20(-7.55,-3.5) 21(-7.55,-4) 22(-7.55,-4.5) 23(-7.55,-5) 24(-7.55,-5.5) 25(-7.55,-6) 51(7.55,-6) 52(7.55,-5.5) 53(7.55,-5) 54(7.55,-4.5) 55(7.55,-4) 56(7.55,-3.5) 57(7.55,-3) 58(7.55,-2.5) 59(7.55,-2) 60(7.55,-1.5) 61(7.55,-1) 62(7.55,-0.5) 63(7.55,0) 64(7.55,0.5) 65(7.55,1) 66(7.55,1.5) 67(7.55,2) 68(7.55,2.5) 69(7.55,3) 70(7.55,3.5) 71(7.55,4) 72(7.55,4.5) 73(7.55,5) 74(7.55,5.5) 75(7.55,6)
  oval 0.3x1.8 smd: 26(-6,-7.55) 27(-5.5,-7.55) 28(-5,-7.55) 29(-4.5,-7.55) 30(-4,-7.55) 31(-3.5,-7.55) 32(-3,-7.55) 33(-2.5,-7.55) 34(-2,-7.55) 35(-1.5,-7.55) 36(-1,-7.55) 37(-0.5,-7.55) 38(0,-7.55) 39(0.5,-7.55) 40(1,-7.55) 41(1.5,-7.55) 42(2,-7.55) 43(2.5,-7.55) 44(3,-7.55) 45(3.5,-7.55) 46(4,-7.55) 47(4.5,-7.55) 48(5,-7.55) 49(5.5,-7.55) 50(6,-7.55) 76(6,7.55) 77(5.5,7.55) 78(5,7.55) 79(4.5,7.55) 80(4,7.55) 81(3.5,7.55) 82(3,7.55) 83(2.5,7.55) 84(2,7.55) 85(1.5,7.55) 86(1,7.55) 87(0.5,7.55) 88(0,7.55) 89(-0.5,7.55) 90(-1,7.55) 91(-1.5,7.55) 92(-2,7.55) 93(-2.5,7.55) 94(-3,7.55) 95(-3.5,7.55) 96(-4,7.55) 97(-4.5,7.55) 98(-5,7.55) 99(-5.5,7.55) 100(-6,7.55)
  silkscreen extent -7.68,-6.25 6.25,6.82, body extent -7,-7 7,7, height 1.2
USB_MINI/SM0.8-6H5 [mm] "Connector; USB2.0, Type B, SM; 5 Position; Right Angle"
  rect 2.5x2 smd: 0(-7.75,-4.45) 0(-7.75,4.45) 0(-2.25,4.45) 0(-2.25,-4.45)
  rect 2.3x0.5 smd: 1(-7.85,-1.6) 2(-7.85,-0.8) 3(-7.85,0) 4(-7.85,0.8) 5(-7.85,1.6)
  round 0.6 hole 0.9 unplated: MH1(-5.25,2.2) MH2(-5.25,-2.2)
  silkscreen extent -9.68,-4.95 0.7,4.95, body extent -8.74,-4.95 0.66,4.95, height 3.9
X-TAL [mil]
  round 80 hole 30: 1(180,0) 2(0,0)
  silkscreen extent -125,-90 305,90

## Part data
5V 12V PS_ON PWR: "Header, 2-Pin"
5V_SEL VFA0_sel VFA1_sel VHE2_sel X+ X- Y+ Y- Z+ Z-: "Header, 3-Pin"
C1 C2 C21 C22 C23 C24 C25 C30 C31 C32: "Polarized Capacitor (Surface Mount)"
C3 C4 C5 C6 C7 C8 C9 C11 C12 C13 C14 C15 C16 C18 C19 C20 C26 C27 C28 C29 C33: "Capacitor (Semiconductor SIM Model)"
D1 D2 D3 D6 D7: library part Diode, "Default Diode"
D4 D5: "Default Diode"
D8: library part "Diode schottky", "Default Diode"
E0_MOT E0_MOT_A E1_MOT E1_MOT_A E2_MOT E2_MOT_A ENC_1 ENC_2 ENC_3 USB_H X_MOT X_MOT_A Y_MOT Y_MOT_A Z_MOT Z_MOT_A: "Header, 4-Pin"
E0_MS E1_MS E2_MS X_MS Y_MS Z_MS: "DIP Switch"
EXP1 EXP2 JTAG: "Header, 5-Pin, Dual row"
EXP3: "Header, 7-Pin, Dual row"
F1 F2: library part "Fuse 1", "Fuse"
IC1: "The high-performance, low-power Atmel 8-bit AVR RISC-based microcontroller"
IC2: library part ATMEGA16U2-MU, "High Performance, Low Power USB2.0 AVR® 8-Bit Microcontroller"
IC4: "600mA, 500kHz Step-Down  Switching Regulator in  SOT-23"
IC5: "3.0 A, Step-Down Switching  Regulator"
ISP1 ISP2: "Header, 3-Pin, Dual row"
L1 L3 L4: "MagneticCore Inductor with Winding Polarity Marking"
LD2 LD3 LD4 LD5 LD6 LD7 Power: library part "LEDG  0805", "Hyper-Bright Low Current LED OSRAM"
LED1 RX TX: library part "LEDY  0805", "Hyper-Bright Low Current LED OSRAM"
Q1 Q2 Q3 Q4 Q5 Q6: library part STP55NF06L
R1 R2 R3 R4 R5 R6 R7 R8 R9 R11 R12 R13 R14 R15 R16 R17 R18 R21 R22 R23 R24 R25 R26 R27 R28 R29 R30 R31 R32 R33 R34 R35 R36 R37 R38 R39 R40 R41 R42 R43 R44 R45 R46 R47 R48 R49 R50 R51 R52 R53 R54 R55 R56 R57: "Resistor"
Reset: library part SW-PB
Thermistors: "Header, 10-Pin"
Y1 Y2: library part XTAL, "Crystal Oscillator"
Z1 Z2: "VARISTOR_CN0603 (VARISTOR)"

## Free pads (board coordinates)
  round 1.524 hole 0.762: 0(59.339,48.535) 1(86.872,67.458) 2(74.655,94.128) 3(65.003,84.553) 4(71.302,53.539) 5(182.935,51.66) 6(182.859,55.673) 8(184.383,53.742) 9(166.298,76.577)
  round 1 hole 0.5: 2(88.384,56.13) 2(88.384,57.425) 2(88.384,58.721) 2(88.384,60.016) 2(88.384,61.312) 2(88.384,62.607) 2(89.812,56.13) 2(89.812,57.425) 2(91.241,56.13) 2(91.241,57.425) 2(92.67,56.13) 2(92.67,57.425) 2(94.099,56.13) 2(94.099,57.425) 2(94.099,58.721) 2(94.099,60.016) 2(94.099,61.312) 2(94.099,62.607) 2(96.791,56.155) 2(96.791,57.451) 2(96.791,58.746) 2(96.791,60.042) 2(96.791,61.337) 2(96.791,62.632) 2(98.22,56.155) 2(98.22,57.451) 2(99.649,56.155) 2(99.649,57.451) 2(101.077,56.155) 2(101.077,57.451) 2(102.506,56.155) 2(102.506,57.451) 2(102.506,58.746) 2(102.506,60.042) 2(102.506,61.337) 2(102.506,62.632) 2(105.173,56.155) 2(105.173,57.451) 2(105.173,58.746) 2(105.173,60.042) 2(105.173,61.337) 2(105.173,62.632) 2(106.602,56.155) 2(106.602,57.451) 2(108.031,56.155) 2(108.031,57.451) 2(175.087,65.934) 2(175.087,67.236) 2(175.087,68.538) 2(175.087,69.84) 2(175.087,71.141) 2(176.103,65.299) 2(176.103,66.595) 2(176.103,67.89) 2(176.103,69.186) 2(176.103,70.481) 2(176.103,71.776) 2(177.531,65.299) 2(177.531,66.595) 2(178.96,65.299) 2(178.96,66.595) 2(180.389,65.299) 2(180.389,66.595) 2(181.818,65.299) 2(181.818,66.595) 2(181.818,67.89) 2(181.818,69.186) 2(181.818,70.481) 2(181.818,71.776) 2(182.707,65.934) 2(182.707,67.236) 2(182.707,68.538) 2(182.707,69.84) 2(182.707,71.141)

## Via types
v1: diameter 0.8, hole 0.4, Top Layer to Bottom Layer, tented both sides, 160 vias

## Nets (pads, with @x,y where several pads share a name; then routed paths per layer and width w, separated by ;. In a path a pad name is that pad's centre, name@x,y a point inside that pad or via, vN(x,y) a via of type N, cw(c..) or ccw(c..) an arc to the next point about the centre after c; other vN are vias at no path point)
5V_DCDC: 5V_SEL.1 C2.1 D4.1 E0.10 E0_MS.4 E0_MS.5 E0_MS.6 E1.10 E1_MS.4 E1_MS.5 E1_MS.6 E2.10 E2_MS.4 E2_MS.5 E2_MS.6 L3.2 pad.9 R5.2 R21.1 R23.1 R25.1 R27.1 R29.1 R45.1 X.10 X_MS.4 X_MS.5 X_MS.6 Y.10 Y_MS.4 Y_MS.5 Y_MS.6 Z.10 Z_MS.4 Z_MS.5 Z_MS.6 | length 199.5
  Top Layer w0.2: 5V_SEL.1@91.419,94.484 92.613,94.484 93.299,93.798 93.299,91.284 94.297,90.285 96.685,90.285 98.318,88.652 R21.1@102.832,88.652 ; X.10@108.199,89.005 109.48,90.285 111.925,90.285 113.558,88.652 R23.1@118.072,88.652 ; Y.10@123.439,89.005 124.72,90.285 127.165,90.285 128.798,88.652 R25.1@133.312,88.652 ; Z.10@138.679,89.005 139.891,90.217 142.397,90.217 144.03,88.584 R27.1@148.544,88.584 ; E0.10@153.911,88.936 155.191,90.217 157.637,90.217 159.27,88.584 R29.1@163.784,88.584 ; E1.10@169.151,88.936 170.431,90.217 172.877,90.217 174.51,88.584 E2_MS.5@175.898,88.584 R45.1@179.024,88.584
  Top Layer w0.5: R5.2@164.723,75.194 166.298,75.194 ; pad.9@166.298,76.577 166.298,75.194 ; D4.1@166.933,72.665 167.441,72.157 C2.1@167.441,69.261 ; D4.1@167.212,72.665 167.212,74.368 166.386,75.194 166.298,75.194
  Top Layer w1: L3.2@162.424,66.112 165.573,69.261 C2.1@167.441,69.261
  Bottom Layer w0.5: 5V_SEL.1@91.419,94.484 92.689,94.484 94.365,92.808 97.49,92.808 101.293,89.005 108.199,89.005 109.462,90.268 111.968,90.268 113.231,89.005 123.439,89.005 124.702,90.268 127.208,90.268 128.471,89.005 138.679,89.005 139.942,90.268 142.448,90.268 143.711,89.005 153.919,89.005 155.182,90.268 157.688,90.268 158.951,89.005 166.425,89.005 ; pad.9@166.298,76.577 166.298,88.878 166.425,89.005 ; E1.10@169.151,88.936 170.414,90.199 172.919,90.199 174.182,88.936 E2.10@184.391,88.936 ; E1.10@169.159,89.005 166.425,89.005
+5V: 5V.1 5V_SEL.2 C5.2 C6.2 C7.2 C13.2 D2.2 D3.2 ENC_1.4 ENC_2.4 ENC_3.4 EXP2.10 EXP3.2 IC1.10 IC1.31 IC1.61 IC1.80 IC1.100 IC2.4 IC2.32 ISP1.2 ISP2.2 JTAG.4 JTAG.7 pad.2@74.655,94.128 pad.3 pad.4 R2.2 R3.2 R4.2 R11.2 R12.2 R15.1 R16.1 R40.1 R41.1 R42.1 R43.1 R54.1 X+.3 X-.3 Y+.3 Y-.3 Z+.3 Z-.3 | length 284.4
  Top Layer w0.2: v1@47.532,81.185 48.434,82.087 R43.1@48.434,82.963 ; v1(47.672,66.287) 48.383,66.998 R40.1@48.383,67.723 ; v1(47.723,71.291) 48.434,72.002 R41.1@48.434,72.727 ; v1(47.723,76.422) 48.434,77.133 R42.1@48.434,77.858 ; R54.1@48.332,62.668 49.082,62.668 ; C5.2@60.71,90.762 60.765,90.817 IC1.61@62.76,90.817 71.344,90.817 ; R4.2@63.149,44.841 63.823,44.841 66.325,47.343 C13.2@66.325,49.305 66.967,49.305 70.558,52.897 ; R3.2@65.804,65.909 65.804,65.21 v1(66.172,64.842) 66.502,64.512 R12.2@66.502,63.635 ; C7.2@66.31,79.269 IC1.80@66.31,82.216 ; IC1.80@66.31,82.267 66.31,85.783 ; IC2.32@69.057,52.955 IC2.32@68.998,52.897 70.558,52.897 ; 70.172,89.645 71.5,88.317 ; R2.2@70.908,65.909 70.908,65.516 v1(71.683,64.741) D3.2@71.683,62.505 ; IC2.4@72.848,51.547 72.848,52.73 72.681,52.897 70.558,52.897 ; IC1.31@73.81,97.367 73.81,93.5 73.918,93.392 ; IC1.100@76.31,82.267 76.31,83.507 71.5,88.317 ; v1@78.186,98.879 R11.2@79.132,98.879 80.986,98.879 D2.2@81.324,99.217 ; v1@79.43,51.228 v1(79.506,51.304) 80.657,51.304 80.734,51.228 ; C6.2@79.799,88.032 79.515,88.317 IC1.10@77.86,88.317 71.5,88.317 ; R15.1@80.734,50.531 80.734,51.228 ; R16.1@80.734,52.031 80.734,51.228
  Top Layer w0.6: pad.3@64.978,84.476 pad.3@65.003,84.476 ; pad.3@65.041,84.515 66.31,85.783 ; 66.4,85.873 70.172,89.645 71.344,90.817 ; 71.498,90.972 73.918,93.392 pad.2@74.655,94.128 ; ISP2.2@74.426,64.969 74.731,64.969 EXP3.2@78.198,68.436 ; 5V.1@82.758,62.455 5V.1@82.758,62.495
  Bottom Layer w0.2: 46.808,66.287 46.859,66.287 v1(47.672,66.287) ; 46.859,71.291 v1(47.723,71.291) ; 46.859,76.422 v1(47.723,76.422) ; 49.5,61.08 49.5,62.35 v1(49.5,62.58) ; 66.172,63.75 v1(66.172,64.842) ; 71.353,63.75 71.302,63.699 pad.4@71.302,53.539 77.119,53.539 79.43,51.228 v1(79.506,51.304) ; 71.658,63.75 71.683,63.775 v1(71.683,64.741) ; 77.424,98.879 v1(78.287,98.879) ; 89.743,96.846 89.844,96.948 ; 5V_SEL.2@91.419,91.944 92.714,91.944 93.807,90.852 93.807,84.146 95.254,82.698 ; JTAG.7@95.254,81.073 95.254,82.698 ; JTAG.4@100.334,78.533 99.064,79.803 99.064,81.784 98.15,82.698 95.254,82.698
  Bottom Layer w0.3: ISP1.2@87.711,96.846 89.743,96.846
  Bottom Layer w0.6: 45.767,82.975 46.859,81.883 46.859,76.422 46.859,71.291 46.859,66.287 ; 46.75,66.287 46.75,62.35 46.75,61.08 49.5,61.08 50.8,61.08 ; 50.8,62.48 52.07,63.75 66.171,63.75 71.353,63.75 71.658,63.75 73.207,63.75 ISP2.2@74.426,64.969 ; 54.767,85.645 54.767,92.503 52.532,94.738 52.532,107.438 54.22,109.126 58.004,109.126 60.782,111.904 EXP2.10@62.371,111.904 ; 55.859,84.553 pad.3@65.003,84.553 ; pad.2@74.655,94.128 77.373,96.846 77.373,100.047 81.767,104.441 88.625,104.441 90.403,102.663 90.403,98.345 89.844,97.786 89.844,96.948 89.844,92.731 90.632,91.944 5V_SEL.2@91.419,91.944 ; ISP2.2@74.68,64.969 ISP2.2@74.426,64.969 ; 5V.1@82.758,62.455 81.493,63.719 75.676,63.719 ISP2.2@74.426,64.969
  other v1: 47.418,81.298
+12V: 12V.1 C32.1 C33.1 EXP3.1 L4.2 R57.2 VFA0_sel.3 VFA1_sel.3 VHE2_sel.3 | length 95.9
  Top Layer w0.254: C33.1@135.196,69.516 R57.2@135.196,70.964 C32.1@135.196,75.853
  Top Layer w1.3: VFA1_sel.3@129.316,62.175 129.798,62.658 129.798,72.564 131.018,73.783 133.126,73.783 C32.1@135.196,75.853 ; C32.1@135.196,75.929 136.913,77.647
  Top Layer w1.5: 136.913,77.647 L4.2@142.498,77.647
  Bottom Layer w0.5: EXP3.1@78.262,70.913 78.719,70.913 81.335,68.297 83.139,68.297 86.822,64.614 119.943,64.614 120.68,63.877 VFA0_sel.3@120.68,62.124
  Bottom Layer w1.3: VHE2_sel.3@112.171,62.124 VFA0_sel.3@120.68,62.124 VFA1_sel.3@129.265,62.124
A9: EXP3.7 IC1.88 | length 12.2
  Top Layer w0.2: 70.31,79.5 70.31,80.006 ; IC1.88@70.31,82.267 70.31,80.006 ; v1@70.667,78.736 v1(70.667,78.66) 70.31,79.017 70.31,80.006
  Bottom Layer w0.2: EXP3.7@70.642,70.913 70.642,78.711 70.667,78.736 v1(70.667,78.66)
A10: EXP3.8 IC1.87 | length 14.6
  Top Layer w0.2: v1(69.372,78.076) 69.81,78.514 IC1.87@69.81,82.267
  Bottom Layer w0.2: v1(69.372,78.076) 69.372,69.922 70.642,68.652 EXP3.8@70.642,68.373
AREF: C4.2 IC1.98 | length 4.4
  Top Layer w0.2: IC1.98@75.31,82.267 75.36,82.217 75.36,81.331 75.77,80.92 77.398,80.92 77.793,81.315 C4.2@77.793,82.038
BEEPER: EXP2.1 IC1.40 | length 27
  Top Layer w0.254: IC1.40@69.31,97.367 69.287,97.39 69.287,98.599 67.476,100.41 64.647,100.41 64.314,100.743 64.314,104.641 69.426,109.753 71.021,109.753 71.044,109.775 72.699,109.775 73.608,110.683 73.608,113.367 EXP2.1@72.531,114.444
BTN_EN1: EXP1.5 IC1.25 | length 24.5
  Top Layer w0.254: IC1.25@77.86,95.817 80.611,95.817 85.755,100.961 85.755,104.949 84.469,106.235 84.469,113.25 EXP1.5@85.663,114.444
BTN_EN2: EXP1.3 IC1.24 | length 26
  Top Layer w0.254: IC1.24@77.86,95.317 80.753,95.317 86.288,100.852 86.288,105.406 85.196,106.498 v1(85.196,108.251)
  Bottom Layer w0.254: v1(85.196,108.251) 85.196,109.064 86.923,110.791 86.923,113.165 EXP1.3@88.203,114.444
BTN_ENC: EXP2.2 IC1.41 | length 22.8
  Top Layer w0.254: IC1.41@68.81,97.367 68.787,97.39 68.787,98.457 67.288,99.956 64.459,99.956 63.86,100.555 63.86,104.829 69.238,110.207 70.833,110.207 EXP2.2@72.531,111.904
DTR: C16.2 IC2.14 R14.1 | length 6.1
  Top Layer w0.254: 77.398,56.097 78.533,56.097 79.1,56.663 79.1,57.222 79.735,57.857 R14.1@80.739,57.857 80.75,57.868 C16.2@80.75,59.546
E0-DIR: E0.8 IC1.78 | length 84.8
  Top Layer w0.2: IC1.78@65.31,82.216 65.31,77.503 65.965,76.848 118.222,76.848 124.726,83.352 138.167,83.352 E0.8@141.211,86.396
E0-EN: E0.1 IC1.76 R27.2 | length 116.4
  Top Layer w0.2: IC1.76@64.31,82.216 64.31,77.372 65.634,76.048 118.553,76.048 125.057,82.552 144.094,82.552 R27.2@150.122,88.581
  Top Layer w0.254: E0.1@141.211,104.176 142.153,104.176 147.705,98.624 147.705,96.287 150.245,93.747 150.245,88.809 R27.2@150.022,88.585
E0-STEP: E0.7 IC1.77 | length 90.2
  Top Layer w0.2: IC1.77@64.81,82.216 64.81,77.437 65.799,76.448 118.388,76.448 124.892,82.952 139.296,82.952 142.293,85.948 142.293,87.192 ; E0.7@141.211,88.583 142.448,87.347
  Top Layer w0.254: E0.7@141.211,88.583 E0.7@141.211,88.936 ; 142.293,87.192 142.448,87.347
E1-DIR: E1.8 IC1.75 | length 106.7
  Top Layer w0.2: IC1.75@62.76,83.817 62.578,83.817 62.107,83.346 62.107,77.838 64.297,75.648 118.719,75.648 125.223,82.152 153.382,82.152 156.451,85.221 E1.8@156.451,86.396
E1-EN: E1.1 IC1.73 R29.2 | length 139.6
  Top Layer w0.2: IC1.73@62.76,84.817 61.584,84.817 61.16,84.393 61.16,77.653 63.965,74.848 119.05,74.848 125.554,81.352 158.219,81.352 R29.2@165.312,88.445
  Top Layer w0.254: E1.1@156.451,104.176 157.393,104.176 162.945,98.624 162.945,96.287 165.485,93.747 165.485,88.809 R29.2@165.262,88.585 ; R29.2@165.312,88.445 R29.2@165.312,88.631
E1-STEP: E1.7 IC1.74 | length 113.4
  Top Layer w0.2: IC1.74@62.76,84.317 61.789,84.317 61.56,84.088 61.56,77.819 64.131,75.248 118.885,75.248 125.389,81.752 154.506,81.752 157.815,85.061 157.815,87.572 E1.7@156.451,88.936
E2-DIR: E2.8 IC1.72 | length 127.9
  Top Layer w0.2: IC1.72@62.76,85.267 IC1.72@62.946,85.267 ; IC1.72@62.76,85.317 61.424,85.317 60.76,84.653 60.76,77.488 63.8,74.448 119.216,74.448 125.72,80.952 166.247,80.952 169.089,83.794 ; 168.298,83.003 169.089,83.794 ; E2.8@171.691,86.396 169.089,83.794
E2-EN: E2.1 IC1.70 R45.2 | length 160
  Top Layer w0.2: IC1.70@62.71,86.267 IC1.70@62.76,86.317 60.93,86.317 59.96,85.347 59.96,77.156 63.468,73.648 119.547,73.648 126.051,80.152 168.044,80.152 173.417,85.524 178.167,85.524 180.502,87.86 R45.2@180.502,88.585
  Top Layer w0.254: E2.1@171.691,104.176 172.633,104.176 178.185,98.624 178.185,96.287 180.725,93.747 180.725,88.809 R45.2@180.502,88.585
E2-STEP: E2.7 IC1.71 | length 132.9
  Top Layer w0.2: IC1.71@62.76,85.817 61.187,85.817 60.36,84.99 60.36,77.322 63.634,74.048 119.382,74.048 125.886,80.552 167.835,80.552 172.851,85.569 172.851,87.776 E2.7@171.691,88.936
FAN_0: IC1.17 R46.1 R47.1 R55.1 | length 67.9
  Top Layer w0.2: IC1.17@77.86,91.817 82.065,91.817 85.418,88.464 v1(86.009,88.464) ; v1(85.298,71.929) 85.475,71.929 85.475,72.132 86.191,72.848 87.279,72.848 ; 87.025,72.848 87.279,72.848 ; R55.1@125.201,70.696 122.255,70.696 120.103,72.848 87.279,72.848
  Bottom Layer w0.2: v1(85.298,71.929) 85.729,72.361 85.729,88.185 v1(86.009,88.464)
FAN_1: IC1.16 R51.1 R52.1 R53.1 | length 60.2
  Top Layer w0.2: IC1.16@77.86,91.317 81.999,91.317 85.766,87.55 v1(86.542,87.55) ; v1(85.856,70.989) 87.315,72.448 112.248,72.448 114.05,70.645 R53.1@117.352,70.645
  Bottom Layer w0.2: v1(85.856,70.989) 85.907,70.989 86.542,71.624 86.542,86.255 86.477,86.32 86.477,86.9 86.542,86.965 86.542,87.194 86.364,87.372 v1(86.542,87.55) v1@86.466,87.55
GND: 5V.2 12V.2 C1.2 C2.2 C3.1 C4.1 C5.1 C6.1 C7.1 C8.1 C9.1 C11.1 C12.1 C13.1 C14.1 C15.1 C19.1 C20.1 C21.2 C22.2 C23.2 C24.2 C25.2 C26.1 C27.1 C28.1 C29.1 C30.2 C31.2 C32.2 D5.1 D6.1 D7.1 D8.1 E0.9 E0.15 E1.9 E1.15 E2.9 E2.15 ENC_1.3 ENC_2.3 ENC_3.3 EXP1.9 EXP2.9 EXP3.3 EXP3.4 HB-PWR.1 IC1.11 IC1.32 IC1.62 IC1.81 IC1.99 IC2.3 IC2.28 IC4.2 IC5.3 IC5.5 IC5.6 ISP1.6 ISP2.6 J2.4 JTAG.2 JTAG.10 L1.2 LD2.2 LD3.2 LD4.2 LD5.2 LD6.2 LD7.2 LED1.2 MAIN-PWR.1 pad.5 pad.6 pad.8 Power.2 PS_ON.2 PWR.2 Q1.3 Q2.3 Q3.3 Q4.3 Q5.3 Q6.3 R6.1 R14.2 R22.2 R24.2 R26.2 R28.2 R30.2 R32.2 R35.2 R38.2 R44.2 R47.2 R49.2 R52.2 R56.2 Reset.1 Thermistors.1 Thermistors.3 Thermistors.5 Thermistors.7 Thermistors.9 USB_H.1 X+.2 X-.2 X.9 X.15 Y+.2 Y-.2 Y.9 Y.15 Z+.2 Z-.2 Z.9 Z.15 | length 62.5
  Top Layer w0.2: 58.553,54.771 60.012,54.771 60.66,54.123 60.66,52.879 USB_H.1@61.853,51.685 ; D8.1@134.193,59.463 D8.1@135.086,58.57 ; R6.1@156.24,75.397 157.219,75.397 157.789,75.967 159.034,75.967 159.44,76.374 IC4.2@159.44,77.219 ; D5.1@158.066,71.841 D5.1@158.08,71.827 ; R32.2@173.156,77.392 173.156,76.45 173.817,75.79 177.576,75.79 v1(178.262,75.104) ; LD2.2@176.56,77.246 178.787,77.246 179.532,76.501 v1(179.532,75.79)
  Top Layer w0.5: C3.1@156.189,71.841 D5.1@158.066,71.841
  Top Layer w1: IC5.6@135.086,52.32 D8.1@135.086,58.57 ; IC5.6@138.486,47.841 IC5.3@138.486,56.074
  Bottom Layer w1: v1(180.827,75.104) 182.63,75.104 185.173,72.561 185.173,54.532 pad.8@184.383,53.742
  other v1: 78.795,47.011 68.051,47.138 83.951,57.781 156.367,61.108 157.789,61.108 159.11,61.108 160.558,61.108 161.929,61.108 142.194,61.261 143.21,61.261 144.2,61.261 107.192,65.833 108.048,65.833 108.903,65.833 109.758,65.833 99.014,65.858 99.869,65.858 100.724,65.858 101.579,65.858 90.606,65.909 91.461,65.909 92.316,65.909 93.172,65.909 115.651,65.934 116.506,65.934 117.361,65.934 118.216,65.934 124.261,65.934 125.116,65.934 125.971,65.934 126.827,65.934 107.624,66.519 108.462,66.519 109.326,66.519 99.445,66.544 100.284,66.544 101.147,66.544 91.038,66.595 91.876,66.595 92.74,66.595 116.082,66.62 116.921,66.62 117.784,66.62 124.693,66.62 125.531,66.62 126.395,66.62 179.117,75.104 179.972,75.104 178.693,75.79 180.395,75.79 66.07,77.974 80.675,81.657 73.487,84.146 72.293,84.197 75.925,85.035 150.068,85.823 151.058,85.823 152.074,85.823 167.314,85.823 104.373,85.848 105.364,85.848 106.38,85.848 119.638,85.848 120.629,85.848 121.645,85.848 134.828,85.848 135.818,85.848 136.834,85.848 167.314,86.813 167.314,87.829 59.567,89.048 75.823,89.15 143.641,92.35 144.632,92.35 145.648,92.35 158.856,92.376 159.847,92.376 160.863,92.376 174.121,92.376 175.112,92.376 176.128,92.376 113.263,92.401 114.254,92.401 115.27,92.401 128.274,92.477 129.265,92.477 130.281,92.477 97.947,94.103 98.937,94.103 99.953,94.103 67.111,101.469 67.111,102.485 67.111,103.476
HB: IC1.18 R31.1 R32.1 R33.1 | length 119.1
  Top Layer w0.2: IC1.18@77.86,92.317 82.131,92.317 85.018,89.429 v1(85.526,89.429) ; v1(84.815,72.843) 85.323,72.843 85.728,73.248 119.713,73.248 126.217,79.752 164.876,79.752 165.537,79.092 v1(167.619,79.092) ; v1(170.388,79.092) R31.1@171.404,79.092 ; R31.1@171.683,79.092 R31.1@171.404,79.092 ; R33.1@174.756,79.103 174.745,79.092 R32.1@173.156,79.092 R31.1@171.404,79.092
  Bottom Layer w0.2: v1(84.815,72.843) 84.861,72.889 84.861,88.764 v1(85.526,89.429) ; v1(167.619,79.092) v1@170.387,79.092
HE_0: IC1.6 R34.1 R35.1 R36.1 | length 30.5
  Top Layer w0.2: IC1.6@77.86,86.317 80.358,86.317 83.353,83.322 83.353,82.865 v1(83.367,82.851) ; v1@83.353,72.778 83.353,70.818 85.425,68.747 87.221,68.747 87.672,69.197 87.672,70.086 88.078,70.493 R36.1@92.053,70.493 R36.1@91.709,70.837
  Bottom Layer w0.2: v1(83.367,72.792) v1(83.367,82.851)
HE_1: IC1.7 R37.1 R38.1 R39.1 | length 38.8
  Top Layer w0.2: IC1.7@77.86,86.817 80.726,86.817 83.93,83.613 v1(84.053,83.613) ; v1(84.053,71.929) 84.053,71.102 85.817,69.338 86.923,69.338 87.126,69.541 87.126,70.608 88.166,71.648 95.307,71.648 96.386,70.569 R39.1@100.029,70.569
  Bottom Layer w0.2: v1@84.067,71.943 v1@84.067,83.613
HE_2: IC1.15 R48.1 R49.1 R50.1 | length 50.7
  Top Layer w0.2: IC1.15@77.86,90.817 81.934,90.817 86.141,86.61 v1(87.177,86.61) ; v1@86.364,70.43 87.982,72.048 103.199,72.048 R48.1@104.627,70.62 ; R48.1@105.084,70.62 R50.1@108.386,70.62
  Bottom Layer w0.2: v1(86.364,70.1) 86.364,70.456 87.177,71.268 v1(87.177,86.61)
J_TCK: IC1.93 JTAG.1 | length 34.6
  Top Layer w0.2: IC1.93@72.81,82.267 72.86,82.217 72.86,80.856 74.853,78.863 88.145,78.863 91.574,82.292 101.884,82.292 102.874,81.301 JTAG.1@102.874,80.844
J_TDI: IC1.90 JTAG.9 | length 27
  Top Layer w0.2: IC1.90@71.31,82.216 71.31,80.709 74.356,77.663 90.041,77.663 v1(90.759,78.38)
  Bottom Layer w0.2: v1(90.759,78.38) 90.759,80.489 91.394,81.124 92.435,81.124 JTAG.9@92.714,80.844
J_TDO: IC1.91 JTAG.3 | length 32.2
  Top Layer w0.2: IC1.91@71.81,82.216 71.81,80.775 74.522,78.063 88.511,78.063 90.073,79.625 92.112,79.625 92.114,79.623 93.315,79.623 93.317,79.625 94.652,79.625 94.654,79.623 99.113,79.623 JTAG.3@100.334,80.844
J_TMS: IC1.92 JTAG.5 | length 28.9
  Top Layer w0.2: IC1.92@72.31,82.267 72.31,80.841 74.688,78.463 88.345,78.463 89.907,80.025 92.277,80.025 92.279,80.023 93.149,80.023 93.152,80.025 94.817,80.025 94.819,80.023 96.973,80.023 JTAG.5@97.794,80.844
KILL: EXP1.10 IC1.38 | length 21.8
  Top Layer w0.254: IC1.38@70.31,97.367 70.31,98.673 70.845,99.208 70.82,99.234 70.489,99.234 v1(70.616,99.107)
  Bottom Layer w0.254: v1(70.616,99.107) 70.616,105.838 76.683,111.904 EXP1.10@80.583,111.904
LCD_D4: EXP2.5 IC1.46 | length 23
  Top Layer w0.254: IC1.46@66.31,97.367 66.287,97.39 66.287,98.315 66.008,98.594 63.746,98.594 63.735,98.583 62.466,99.851 62.466,105.384 68.61,111.527 68.61,113.285 EXP2.5@67.451,114.444
LCD_D5: EXP2.6 IC1.50 | length 17.8
  Top Layer w0.254: IC1.50@64.31,97.367 64.309,97.367 61.98,99.695 61.98,105.838 67.451,111.308 EXP2.6@67.451,111.904
LCD_D6: EXP2.7 IC1.51 | length 22.2
  Top Layer w0.254: IC1.51@62.76,95.817 61.786,95.817 61.526,96.077 61.526,106.026 66.171,110.671 66.171,113.183 EXP2.7@64.911,114.444
LCD_D7: EXP2.8 IC1.52 | length 19.6
  Top Layer w0.254: IC1.52@62.76,95.317 61.563,95.317 61.072,95.808 61.072,106.214 64.911,110.052 EXP2.8@64.911,111.904
LCD_ENA: EXP2.3 IC1.42 | length 25.3
  Top Layer w0.254: IC1.42@68.31,97.367 68.287,97.39 68.287,98.315 67.1,99.502 64.1,99.502 63.377,100.224 63.377,104.988 69.216,110.827 70.437,110.827 71.15,111.54 71.15,113.285 EXP2.3@69.991,114.444
LCD_RS: EXP2.4 IC1.45 | length 20.6
  Top Layer w0.254: IC1.45@66.81,97.367 66.787,97.39 66.787,98.457 66.196,99.048 63.912,99.048 62.92,100.04 62.92,105.173 69.651,111.904 EXP2.4@69.991,111.904
LED: IC1.26 R13.2 | length 11.3
  Top Layer w0.254: R13.2@76.183,107.692 77.373,106.502 77.373,100.885 76.31,99.822 IC1.26@76.31,97.367
MISO2: IC2.17 ISP2.1 | length 3.5
  Top Layer w0.254: ISP2.1@74.426,62.429 74.426,61.693 74.807,61.312 75.392,61.312 76.048,60.655 IC2.17@76.048,59.947
MOSI2: IC2.16 ISP2.4 | length 7.7
  Top Layer w0.254: ISP2.4@76.966,64.969 75.798,63.801 75.798,61.591 77.498,59.891 IC2.16@77.498,58.497
NetC12_2: C12.2 IC2.27 | length 4.3
  Top Layer w0.254: C12.2@66.338,59.008 66.447,58.899 66.959,58.899 67.822,58.035 67.822,57.019 68.026,56.816 69.017,56.816 IC2.27@69.098,56.897
NetC14_2: C14.2 IC2.1 R9.1 Y2.1 | length 8.7
  Top Layer w0.254: IC2.1@70.448,51.447 70.448,49.491 70.846,49.094 C14.2@70.846,48.143 ; C14.2@71.023,48.154 C14.2@71.201,48.154 ; Y2.1@71.201,44.725 C14.2@71.201,48.154 ; C14.2@71.201,48.332 C14.2@71.201,48.154 ; R9.1@72.687,48.154 C14.2@71.201,48.154
NetC15_2: C15.2 IC2.2 R9.2 Y2.2 | length 10.8
  Top Layer w0.254: IC2.2@71.248,51.547 71.248,49.986 71.886,49.348 74.045,49.348 74.387,49.006 R9.2@74.387,48.154 74.399,48.143 C15.2@76.146,48.143 ; Y2.2@75.773,44.725 C15.2@75.773,47.77
NetC18_1: C18.1 D5.2 IC4.6 L3.1 | length 11.3
  Top Layer w0.254: L3.1@158.424,66.112 L3.1@158.424,68.779 ; IC4.6@160.39,74.844 C18.1@162.138,74.844 ; D5.2@160.431,70.786 D5.2@160.431,71.802
  Top Layer w0.5: L3.1@158.424,68.779 D5.2@160.431,70.786 ; D5.2@160.39,71.842 IC4.6@160.39,74.844